# EAGLE board LPT (EAGLE 5.06)
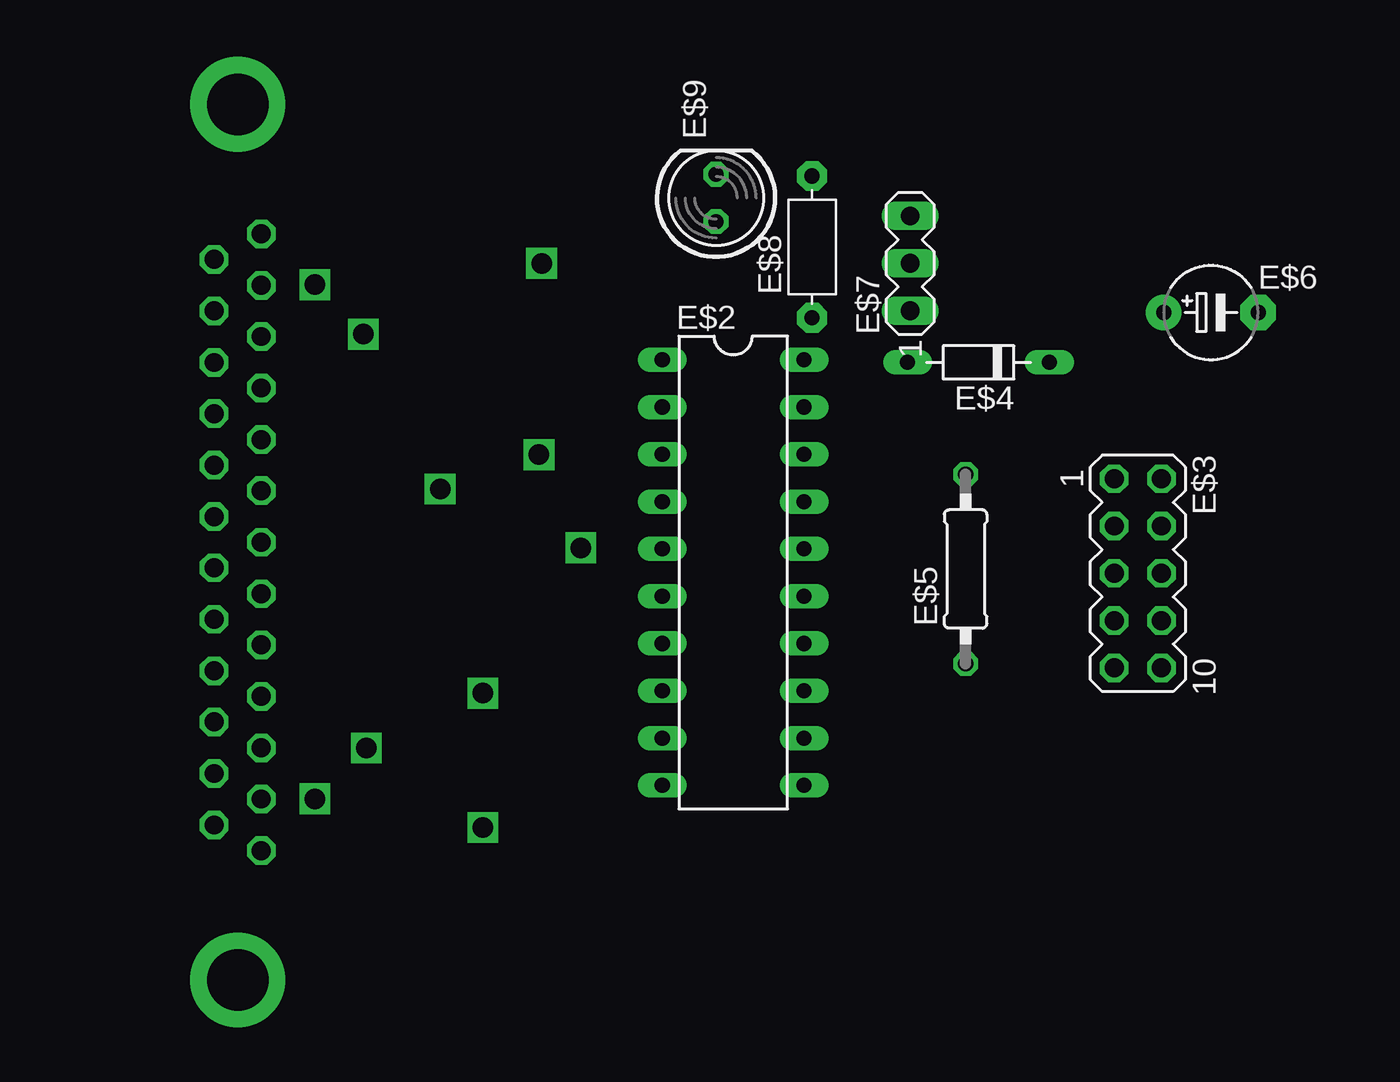
[diagram p0: board, top side]
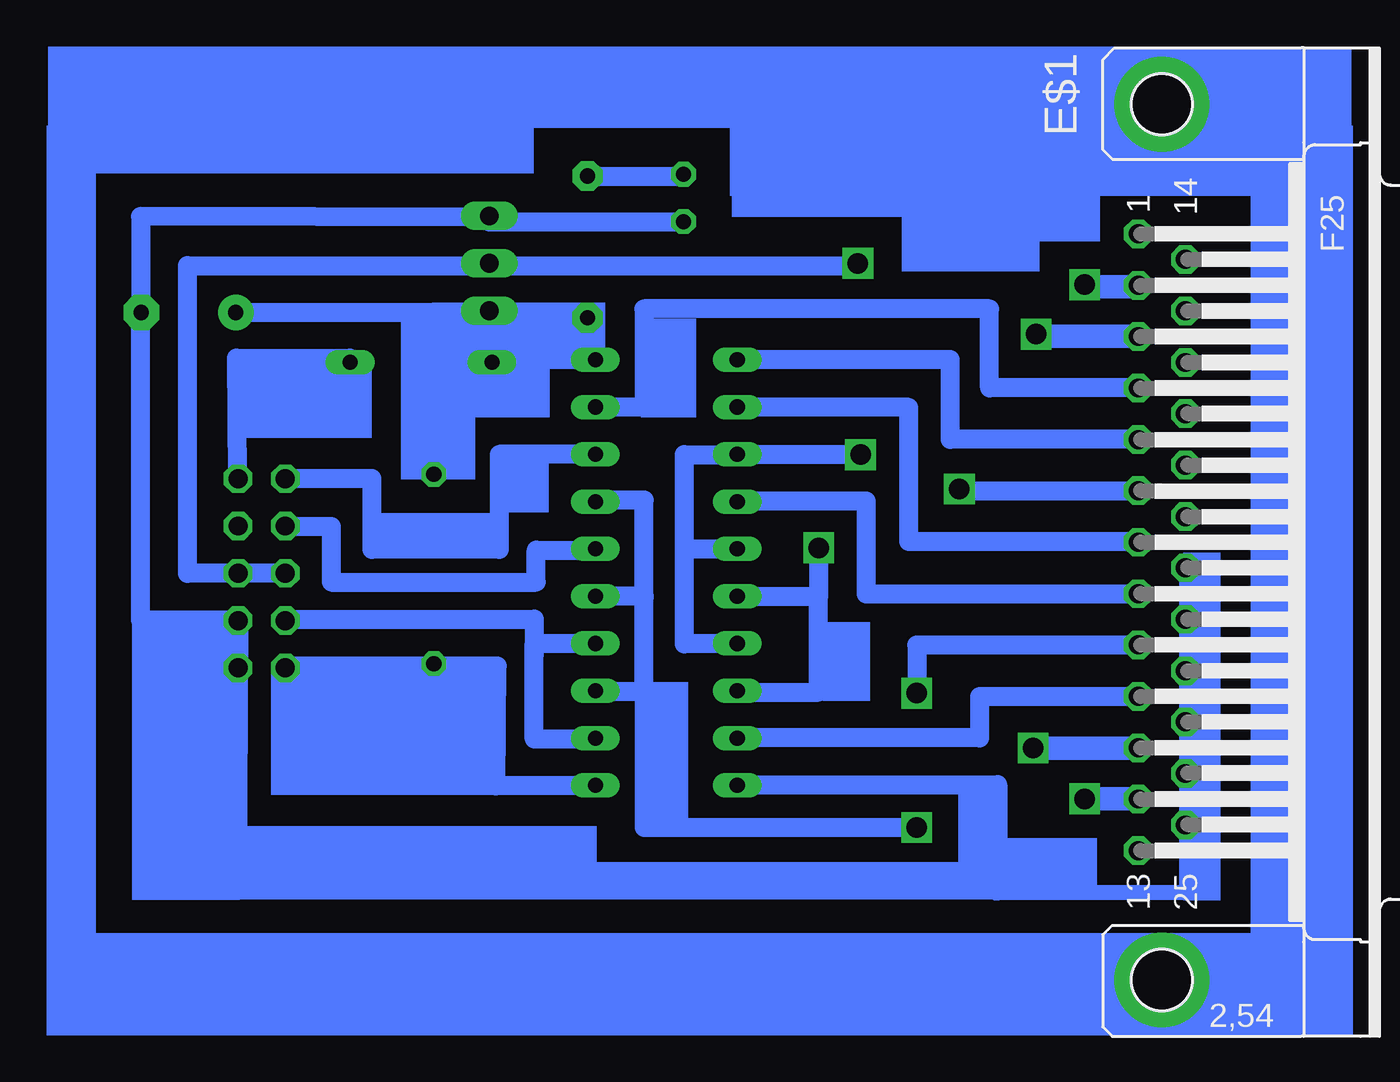
[diagram p1: board, bottom side, seen from below]

No outline drawn. Coordinates in mm, seen from the top.
Copper layers (1*16): Top 0.035mm / dielectric 1.5mm / Bottom 0.035mm
Design rules "default": minimum track width 10mil, minimum drill 24mil, track to track 8mil, track to pad 8mil, pad to pad 8mil, via to via 8mil, smd to smd 8mil, copper to edge 40mil, drill to drill 8mil, minimum pad ring 10mil, minimum via ring 8mil, stop-mask expansion 4mil, vias tented up to drill 0mil, thermal gap 10mil

## Footprints (pad centres in the part's own frame; a part is rotated, then mirrored left to right if it is on the bottom)
F25HP = drill 1.016 octagon: 1 -16.561,-1.27; 2 -13.792,-1.27; 3 -11.049,-1.27; 4 -8.28,-1.27; 5 -5.512,-1.27; 6 -2.769,-1.27; 7 0,-1.27; 8 2.769,-1.27; 9 5.512,-1.27; 10 8.28,-1.27; 11 11.049,-1.27; 12 13.792,-1.27; 13 16.561,-1.27; 14 -15.189,1.27; 15 -12.421,1.27; 16 -9.652,1.27; 17 -6.909,1.27; 18 -4.14,1.27; 19 -1.372,1.27; 20 1.372,1.27; 21 4.14,1.27; 22 6.909,1.27; 23 9.652,1.27; 24 12.421,1.27; 25 15.189,1.27 | drill 3.302 pad 5.08 round: G1 -23.52,0; G2 23.52,0
DIL20 = drill 0.813 long: 1 -11.43,-3.81; 2 -8.89,-3.81; 3 -6.35,-3.81; 4 -3.81,-3.81; 5 -1.27,-3.81; 6 1.27,-3.81; 7 3.81,-3.81; 8 6.35,-3.81; 9 8.89,-3.81; 10 11.43,-3.81; 11 11.43,3.81; 12 8.89,3.81; 13 6.35,3.81; 14 3.81,3.81; 15 1.27,3.81; 16 -1.27,3.81; 17 -3.81,3.81; 18 -6.35,3.81; 19 -8.89,3.81; 20 -11.43,3.81
MA05-2 = drill 1.016 octagon: 1 -5.08,-1.27; 2 -5.08,1.27; 3 -2.54,-1.27; 4 -2.54,1.27; 5 0,-1.27; 6 0,1.27; 7 2.54,-1.27; 8 2.54,1.27; 9 5.08,-1.27; 10 5.08,1.27
D-7.5 = drill 0.813 long: A 3.81,0; C -3.81,0
0207/10 = drill 0.813 octagon: 1 -5.08,0; 2 5.08,0
E5-5 = drill 0.813 pad 1.905 round: + -2.54,0 | drill 0.813 pad 1.905 octagon: - 2.54,0
MA03-1 = drill 1.016 long: 1 -2.54,0; 2 0,0; 3 2.54,0
R-7,5 = drill 0.813 pad 1.6 octagon: 1 -3.81,0; 2 3.81,0
LED5MM = drill 0.813 octagon: A -1.27,0; K 1.27,0

## Placement (x,y rotation side)
E$1  [F25HP]  15.24,29.21 270 bottom
E$2  [DIL20]  41.86,27.58 270 top
E$3  [MA05-2]  63.6,27.54 270 top
E$4  [D-7.5]  55.04,38.87 180 top
E$5  [0207/10]  54.35,27.77 90 top
E$6  [E5-5]  67.53,41.55 0 top
E$7  [MA03-1]  51.37,44.19 90 top
E$8  [R-7,5]  46.1,45.07 90 top
E$9  [LED5MM]  40.94,47.7 90 top

## Library data of the parts
E$1 = con-subd
E$2 = 40xx
E$3 E$7 = con-lstb
E$4 = diode
E$5 = rcl
E$6 = ref-packages
E$8 = discrete
E$9 = led

## Tracks (layer width: path | path; a pad name or v marks a point on that pad's centre or on a via)
S$1
  Bottom 0.813: 13.96,14.02 13.9,14.02 13.9,14.07 | 13.9,14.07 13.9,27.82 | 13.9,14.07 13.9,10.37 24.17,10.37
S$2  (via drill 1.1)
  other vias: 19.39,15.43
S$3  (via drill 1.1)
  other vias: 19.39,43.04
S$4
  Bottom 1.27: 16.51,42.93 19.55,42.93 | 16.51,15.44 19.55,15.44
S$5  (via drill 1.1)
  other vias: 21.99,40.38
S$6  (via drill 1.1)
  other vias: 22.15,18.16
S$7
  Bottom 1.27: 16.45,40.27 22.1,40.27 | 16.56,18.15 22.21,18.15
S$8
  Bottom 1.016: 16.51,20.92 25.03,20.92 25.03,18.7 38.23,18.7
S$9
  Bottom 1.016: 16.51,29.24 28.83,29.24 28.83,36.45 38.07,36.45
S$10
  Bottom 1.016: 16.45,26.41 31.12,26.42 31.12,31.42 38.01,31.41
S$11
  Bottom 1.016: 38.07,16.19 24.06,16.19 24.06,10.49
S$12
  Bottom 1.016: 16.51,34.73 26.6,34.73 26.6,39.02 38.07,39.02
S$13
  Bottom 1.016: 16.51,37.5 24.49,37.5 24.49,41.74 43.06,41.74 43.06,36.46 45.67,36.46
S$14  (via drill 1.1)
  Bottom 1.016: 38.12,26.3 33.67,26.3 v33.67,28.91
S$15  (via drill 1.1)
  other vias: 26.12,32.06
S$16
  Bottom 1.016: 16.56,31.95 26.12,31.95 26.12,32.01
S$17  (via drill 1.1)
  Bottom 1.016: v31.43,33.91 37.9,33.91
S$18
  Bottom 1.016: 38.01,28.86 40.89,28.86 40.89,29.07 | 40.89,29.07 40.89,33.91 38.12,33.91 38.01,33.91 | 38.07,23.75 40.89,23.75 40.89,29.07
S$19
  Bottom 1.016: 38.07,21.16 33.68,21.16 33.68,26.49
S$20  (via drill 1.1)
  Bottom 1.016: 45.68,21.21 43.05,21.21 43.05,21.27 | 43.05,21.27 43.05,26.25 | 43.05,26.25 43.05,26.31 45.74,26.31 | 43.05,26.25 43.05,31.47 45.74,31.47 | 43.05,21.27 43.05,13.89 v28.41,13.89
S$21  (via drill 1.1)
  Bottom 1.016: 16.52,23.68 28.41,23.68 v28.41,21.1
S$22
  Bottom 1.016: 45.68,18.64 48.96,18.64 48.96,23.15 | 48.96,23.15 48.96,23.79 45.74,23.79 45.74,23.85 | 62.32,25.08 48.96,25.08 48.96,23.15
S$23
  Bottom 1.016: 51.31,39.03 51.25,39.03 | 51.25,39.03 45.62,39.03 45.62,39.15 | 54.35,32.87 54.41,39.03 51.25,39.03
S$24
  Bottom 1.016: 64.89,32.7 64.95,39.1 58.86,39.1
S$25
  Bottom 1.016: 45.62,16.12 51.01,16.12 50.95,22.55 62.26,22.55
S$26  (via drill 1.1)
  other vias: 31.57,44.19
S$27
  Bottom 1.016: 62.37,27.54 67.58,27.54 67.58,44.07 31.45,44.07 31.45,44.19
S$28
  Bottom 1.016: 45.68,33.93 50.84,33.93 50.84,28.83 57.69,28.83
S$29
  Bottom 1.016: 62.32,30.06 59.86,30.06 59.86,27.07 48.85,27.07 48.85,28.78 45.74,28.78 45.74,28.77
S$30
  Bottom 1.016: 62.32,32.64 57.69,32.64 57.69,28.95
S$31
  Bottom 1.016: 23.97,10.51 64.88,10.51 64.82,25.12
S$32
  Bottom 1.016: 65.01,41.55 54.41,41.55 54.41,40.2 | 54.41,40.2 54.41,38.97 | 48.67,41.56 54.35,41.56 54.41,40.2
S$33
  Bottom 1.016: 64.95,25.02 70.11,25.02 70.11,41.55 | 70.11,41.55 70.11,41.67 | 51.3,46.65 70.11,46.71 70.11,41.55
S$34
  Bottom 1.016: 45.98,48.87 40.94,48.87
S$35
  Bottom 1.016: 51.36,46.71 51.36,46.41 41,46.41
(copper drawn outside any net)
  shapes: Bottom area x29